# Altium PCB VISUR-botI_b.PcbDoc
Units mm, origin at the board's own origin, x right, y up, seen from the top; angles counter-clockwise.
Board outline 44.5 x 44.5 mm, 2 copper layers (Top Layer, Bottom Layer), stack 1.486 mm thick; 8 components, 13 nets, 52 pads, 0 vias.
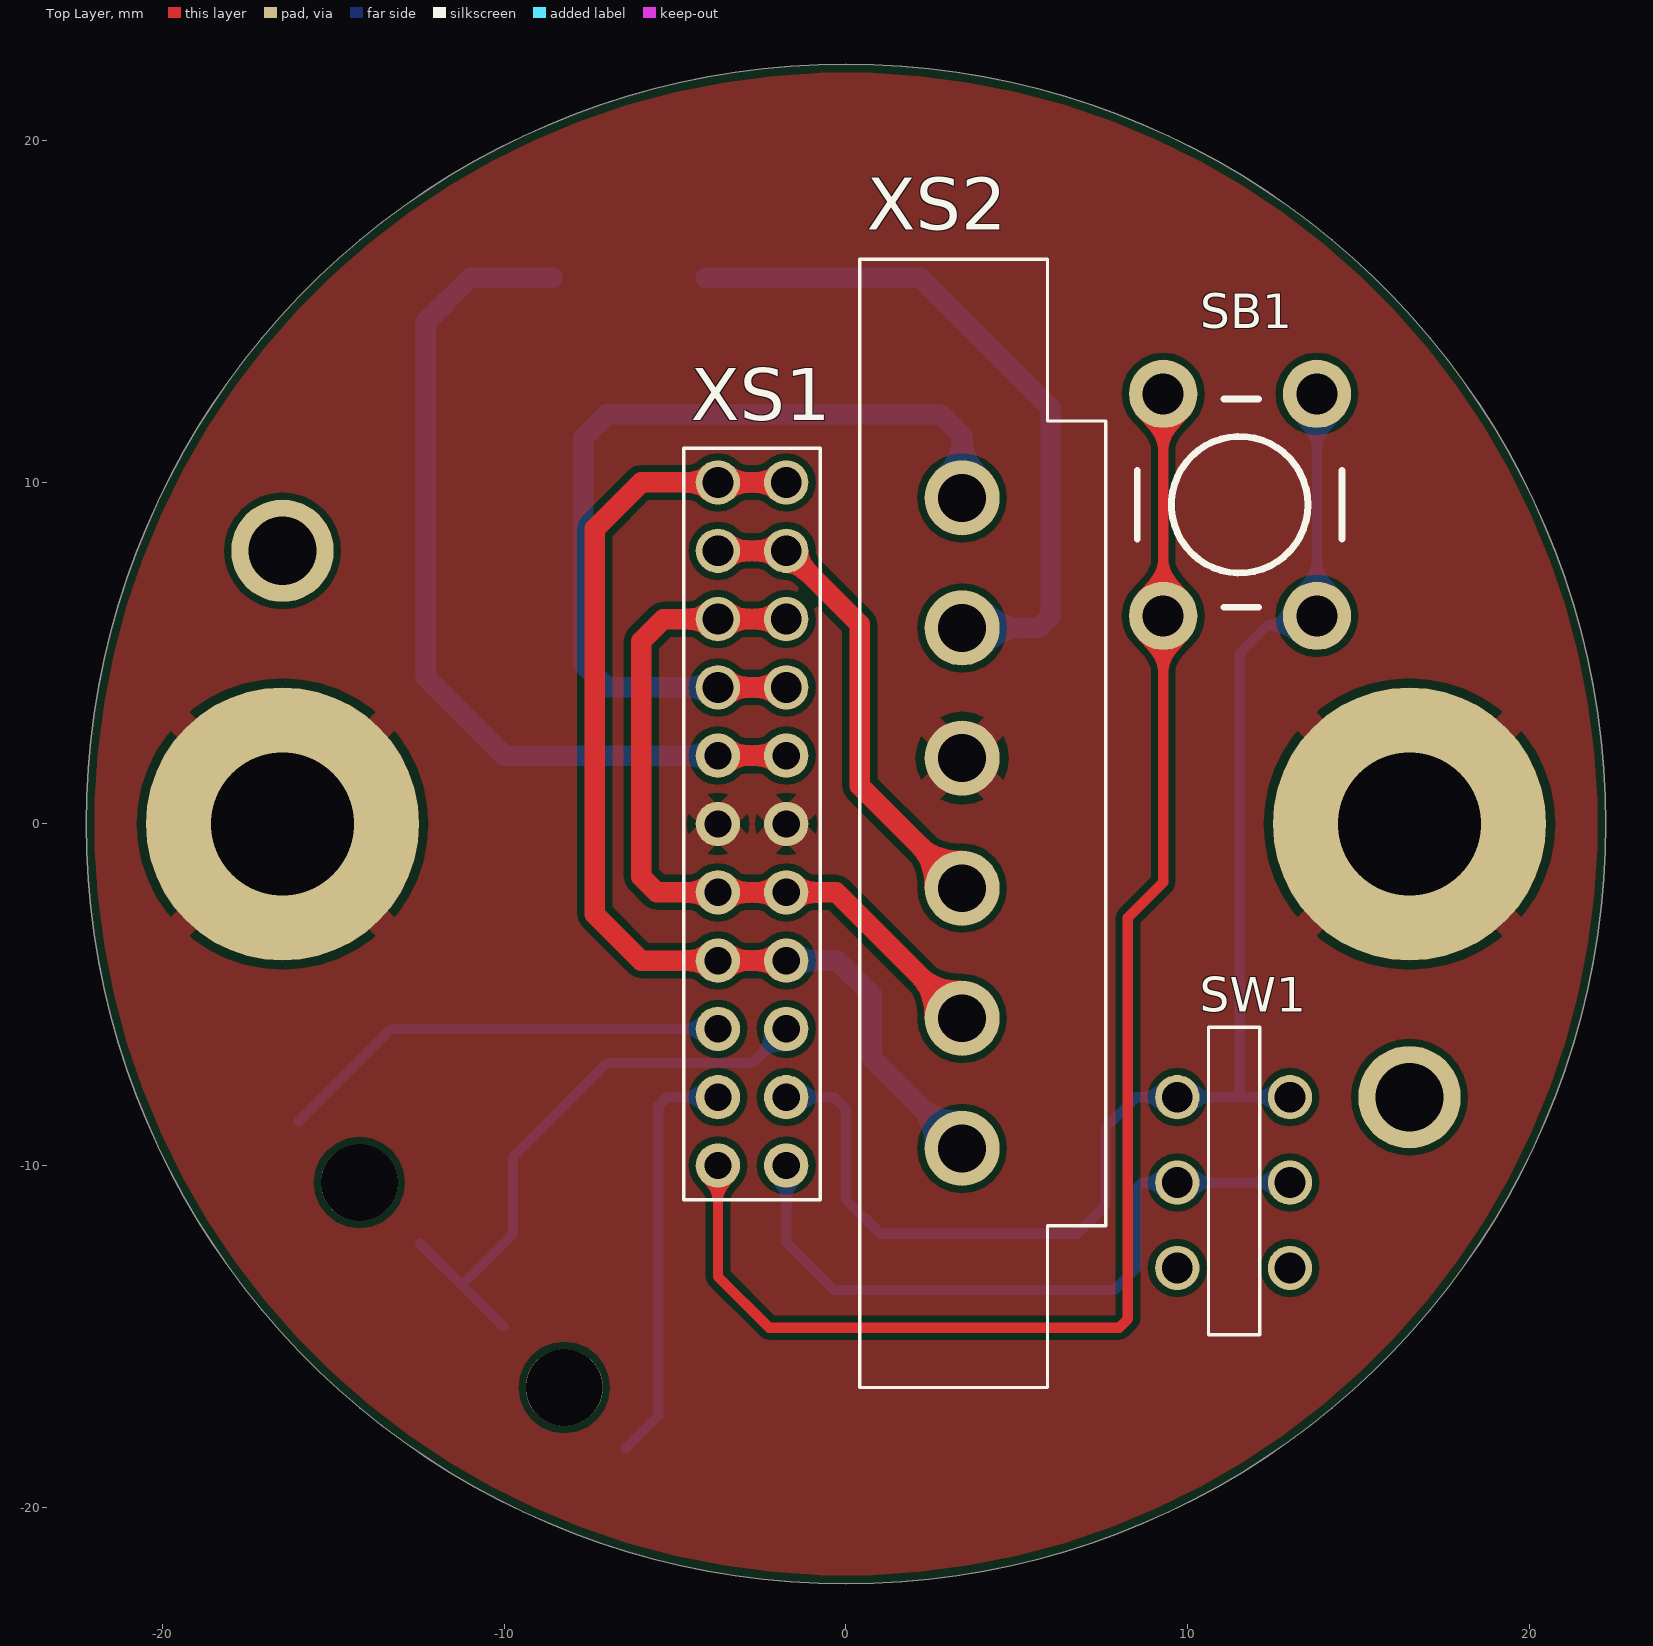
[diagram p0: Top Layer view]
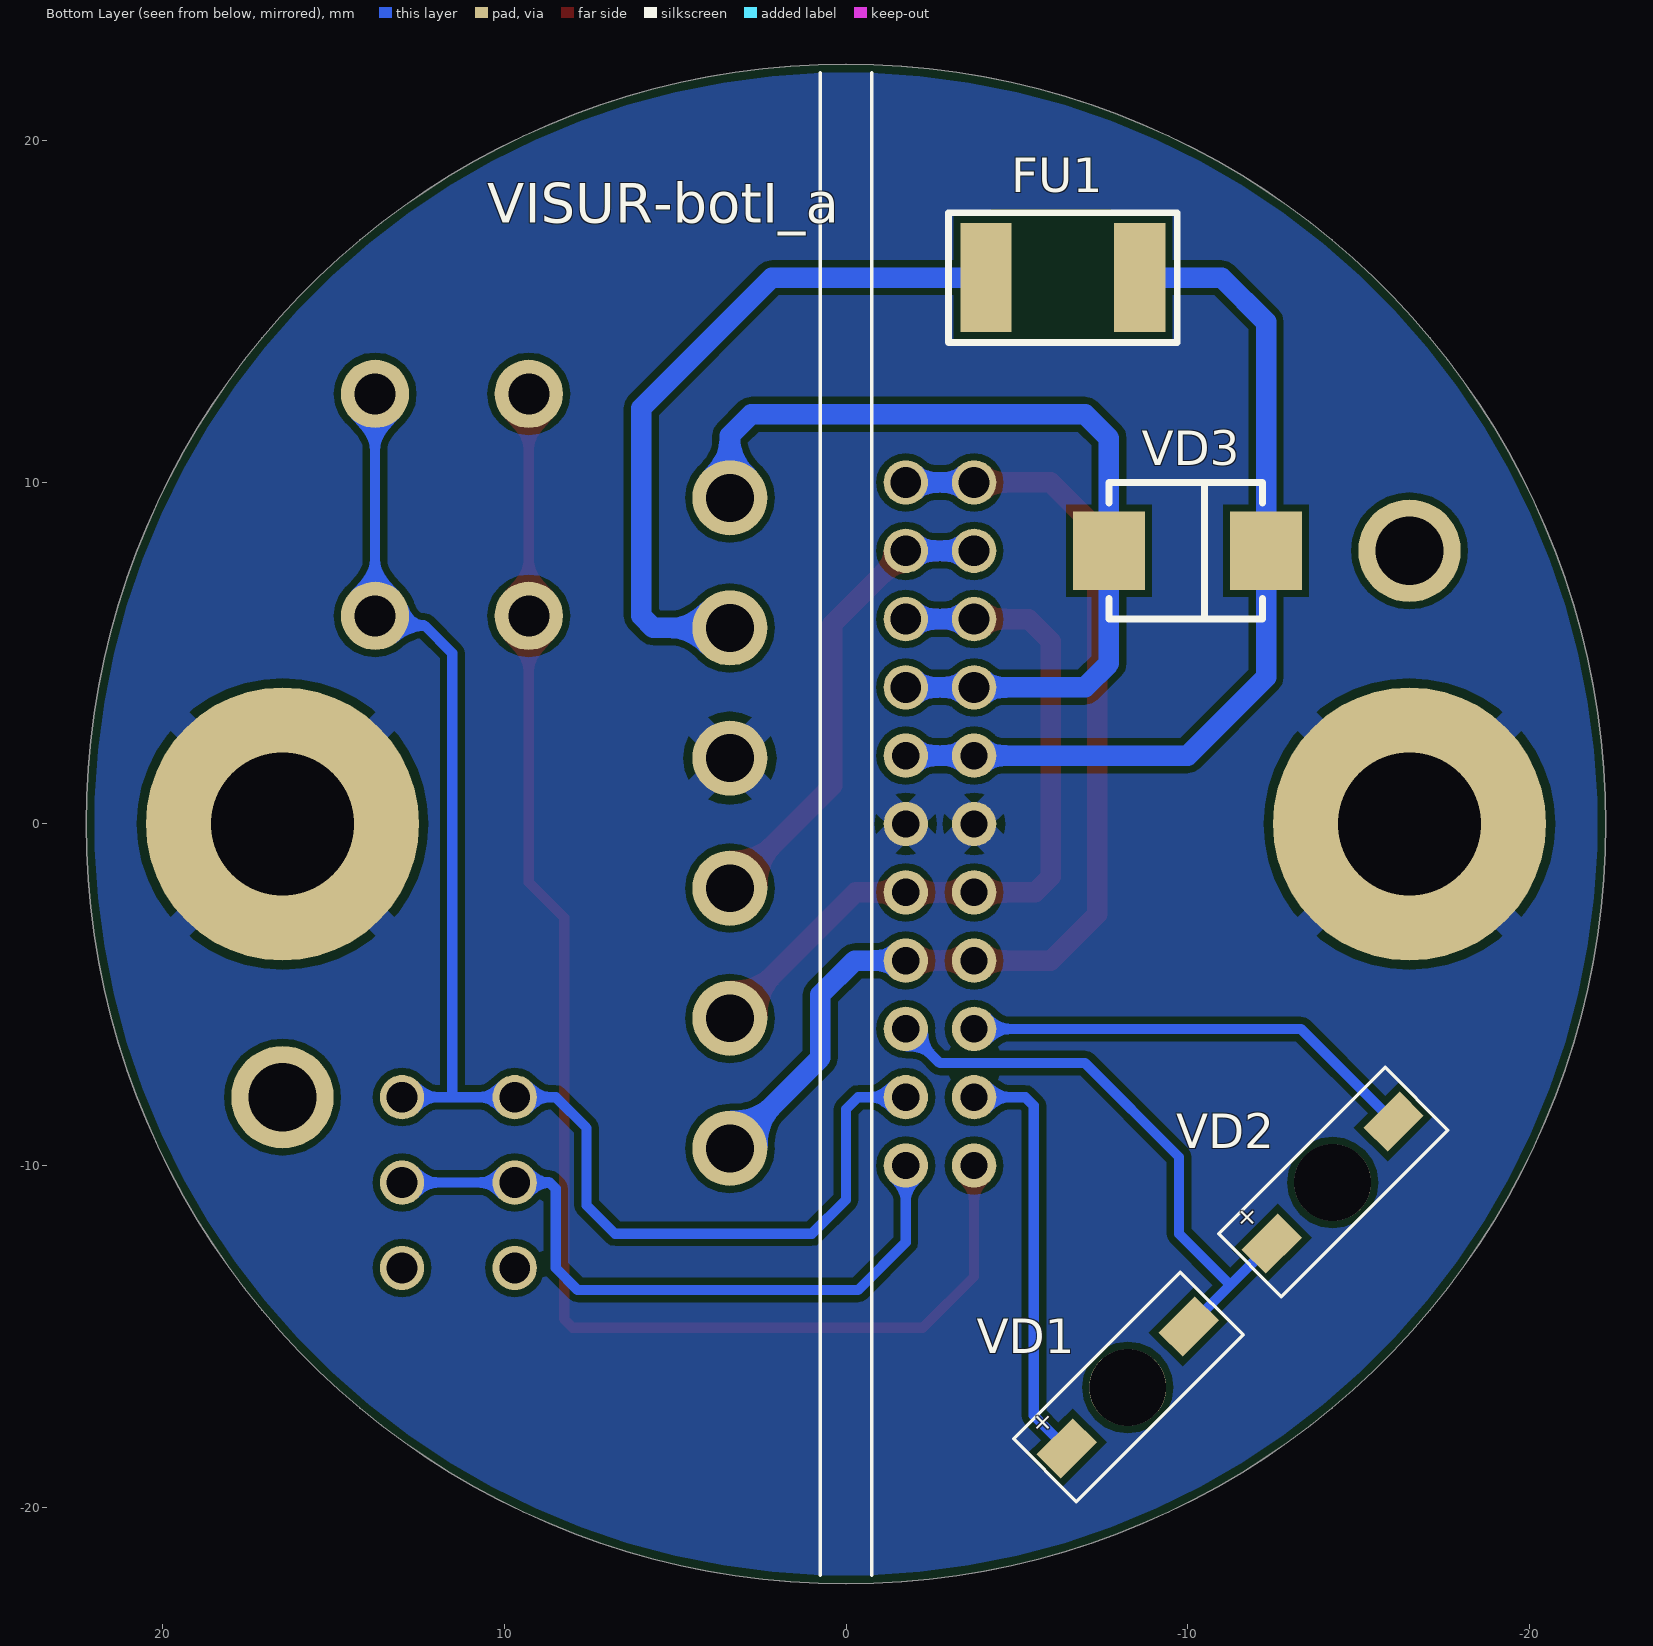
[diagram p1: Bottom Layer view, seen from below]
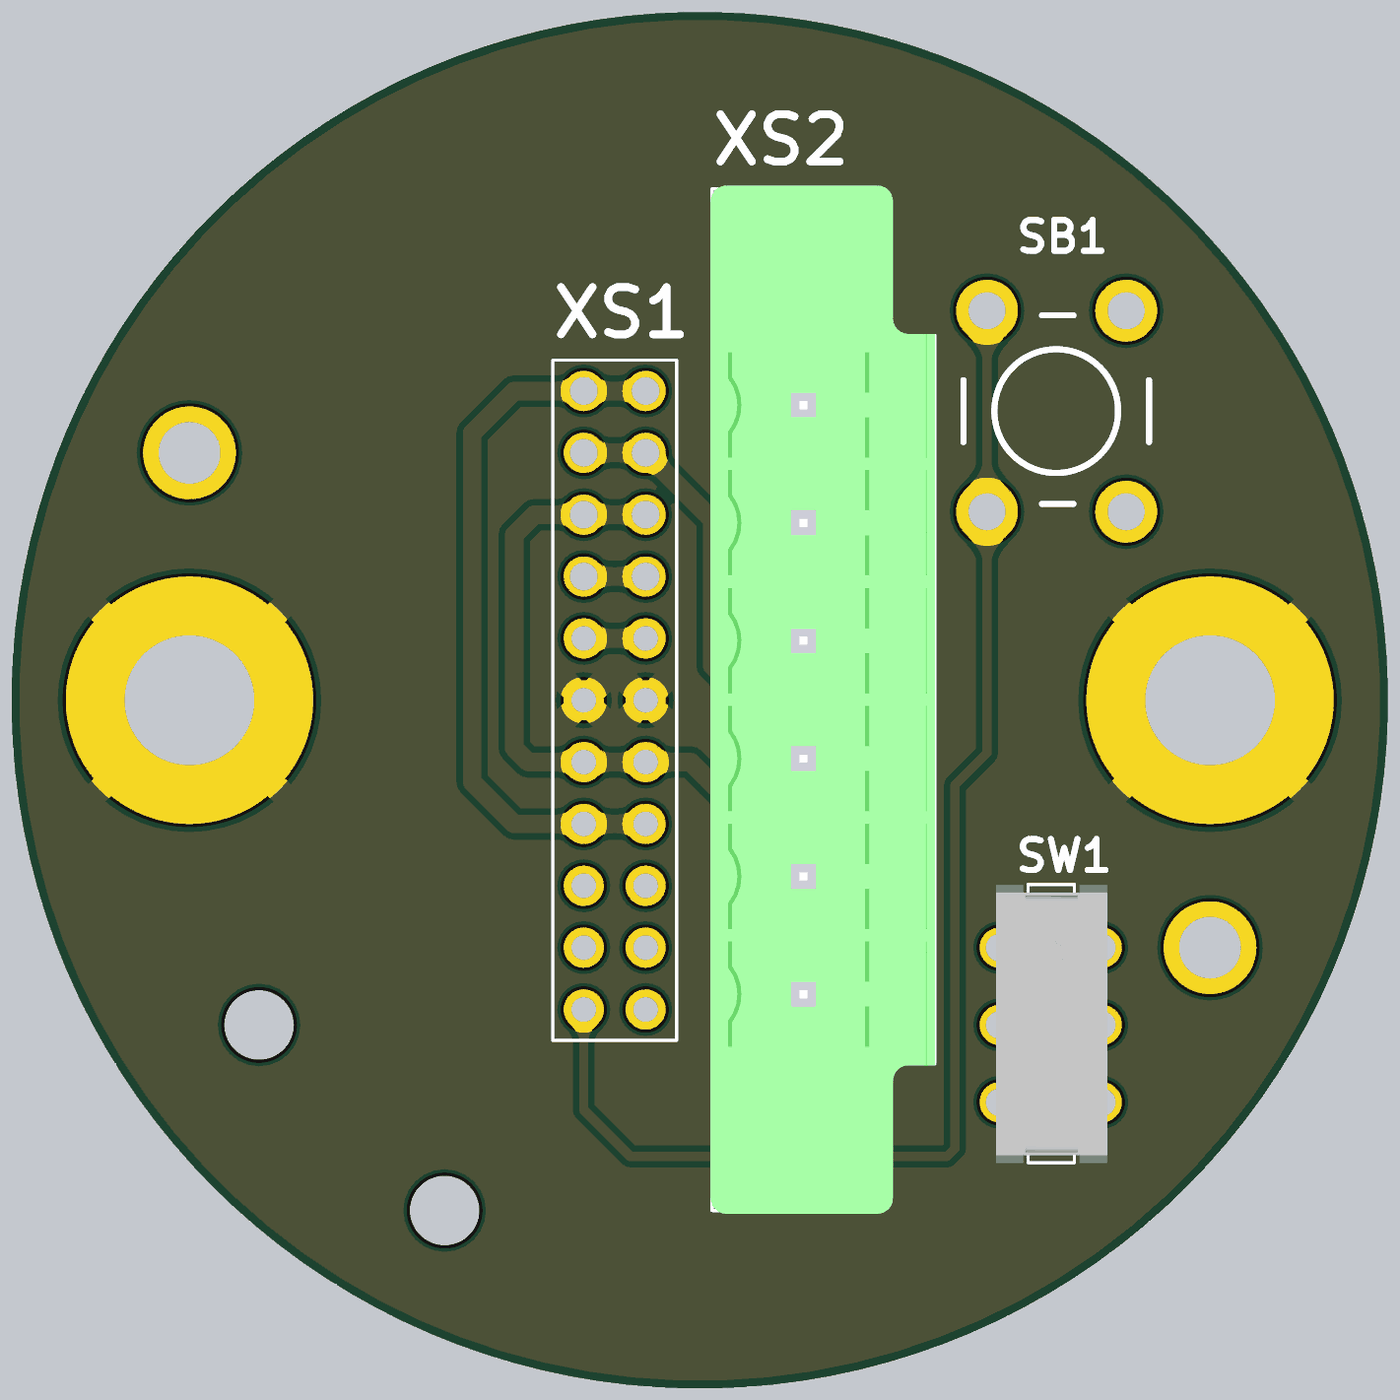
[diagram p2: 3D render of the assembled board from above, using the file's embedded part models]

## Layer stack, top to bottom
Top Solder: solder mask 0.0102, Solder Resist, Dk 3.5
Top Layer: signal copper 0.018
Dielectric 2: prepreg 0.125, PP-006, Dk 4.1
Dielectric 1: dielectric 1.2, FR-4, Dk 4.8
Dielectric 3: prepreg 0.125, PP-006, Dk 4.1
Bottom Layer: signal copper 0.018
Bottom Solder: solder mask 0.0102, Solder Resist, Dk 3.5

## Board outline
-22.25,0 ccw(c0,0) 0,-22.25 ccw(c0,0) 22.25,0 ccw(c0,0) 0,22.25 ccw(c0,0)

## Design rules (kind name [scope] priority, off if disabled: settings)
BoardOutlineClearance [All] p1: gap=0.254 ignorepadtopadclearanceinfootprint=FALSE except(0: Arc-SplitContinuation Track-SplitContinuation SMDPad-SplitContinuation THPad-SplitContinuation Via-SplitContinuation Fill-SplitContinuation Poly-SplitContinuation Region-SplitContinuation Text-SplitContinuation)
Clearance [All] p1: gap=0.2 ignorepadtopadclearanceinfootprint=FALSE except(0: Arc-Hole Track-Hole SMDPad-Hole THPad-Hole Via-Hole Fill-Hole Poly-Hole Region-Hole Text-Hole)
HoleSize [All] p1: absolutevalues=TRUE maxlimit=5 minlimit=0.025 maxpercent=80.000 minpercent=20.000
PolygonConnect CASE [InNet('NetXS1_11')] p1: thpad.connectstyle=Relief thpad.reliefconductorwidth=0.8 thpad.reliefentries=4 thpad.polygonreliefangle="45 Angle" thpad.airgapwidth=0.254 smdpad.connectstyle=Relief smdpad.reliefconductorwidth=0.254 smdpad.reliefentries=4 smdpad.polygonreliefangle="90 Angle" smdpad.airgapwidth=0.254 via.connectstyle=Direct via.reliefconductorwidth=0.254 via.reliefentries=4 via.polygonreliefangle="45 Angle" via.airgapwidth=0.254
PolygonConnect [All] p2: connectstyle=Relief reliefconductorwidth=0.3 reliefentries=4 polygonreliefangle="45 Angle" airgapwidth=0.254
RoutingVias [All] p1: holewidth=0.3 width=0.7 viastyle="Through Hole" minholewidth=0.3 minwidth=0.7 maxholewidth=0.711 maxwidth=1.27
SilkToSilkClearance [All] p1: silktosilkclearance=0.15
SolderMaskExpansion [All] p1: expansion=0.102 istentingtop=FALSE
Width [All] p1: maxlimit=5 minlimit=0.254 preferedwidth=0.254
28 further rules are at their usual default settings.

## Components (designator, comment, footprint, x,y, rotation, side; value= is the part's Value field where it differs from the comment)
FU1 "Electromechanics relay, 250VAC, , 5x20mm," "FUSE: 1812" -6,16 r0 bottom
SB1 "Tactile button, 6x6mm" "BUT: 6x6" 11.539,9.345 r90 top locked
SW1 "JS202011SCQN" JS202011CQN 13,-13 r90 top
VD1 "KM2520SURCK09" KM2520SURCK09 -6.465,-18.285 r135 bottom
VD2 "KM2520SURCK09" KM2520SURCK09 -12.465,-12.285 r135 bottom
VD3 "SMBJ33CA-TR" "DIODE: SMB" -10,8 r180 bottom
XS1 "PLD2-22-R(Female)" "CON: PLD2-22-R(Female)" -3.75,-10 r90 top locked
XS2 "15EDGVM-3.81-06P" "CON: 15EDGVM-3.81-06P" 3.4,-9.5 r90 top locked

## Footprints (in the part's own frame and the unit in brackets; to place one, negate y for a bottom-side part, rotate by r counter-clockwise, add the part's x,y. Pads: shape width x height; smd on the part's side, far side on the other; paste and mask are expansions set on the pad)
"BUT: 6x6" [mm] "Leaded Tactile Button 6x6"
  round 2 hole 1.2: 1(-3.25,2.25) 1(3.25,2.25) 2(-3.25,-2.25) 2(3.25,-2.25)
  silkscreen extent -3,-2.99 3.1,3.01, body extent -3.15,-2.96 3.25,3.04, height 4.5
"CON: 15EDGVM-3.81-06P" [mm]
  round 2.2 hole 1.4: 1(0,0) 2(3.81,0) 3(7.62,0) 4(11.43,0) 5(15.24,0) 6(19.05,0)
  silkscreen extent -7,-4.2 26.04,3, body extent -7.1,-4.2 26.14,3.05, height 9.2
"CON: PLD2-22-R(Female)" [mm]
  round 1.3 hole 0.8: 1(0,-2) 2(0,0) 3(2,-2) 4(2,0) 5(4,-2) 6(4,0) 7(6,-2) 8(6,0) 9(8,-2) 10(8,0) 11(10,-2) 12(10,0) 13(12,-2) 14(12,0)
  round 1.3 hole 0.9: 15(14,-2) 16(14,0) 17(16,-2) 18(16,0) 19(18,-2) 20(18,0) 21(20,-2) 22(20,0)
  silkscreen extent -1,-3 21,1
"DIODE: SMB" [mm]
  rect 2.1x2.3 smd: 1(-2.3,0) 2(2.3,0)
  silkscreen extent -2.3,-2 2.2,2, body extent -2.75,-1.95 2.75,1.95, height 2.45
"FUSE: 1812" [mm]
  rect 1.5x3.2 smd: 1(-2.6,0) 2(1.9,0)
  Top Layer pour cut-out: -1.75,2.25
  Top Layer pour cut-out: -1.75,-2 1.75,-2 1.75,2 -1.5,2 -1.75,2
  silkscreen extent -3.7,-1.9 3,1.9, body extent -2.71,-1.61 2.11,1.61, height 1.32
JS202011CQN [mm]
  round 1.3 hole 0.9: 1(0,0) 2(2.5,0) 3(5,0) 4(5,3.3) 5(2.5,3.3) 6(0,3.3)
  silkscreen extent -1.96,0.88 7.04,2.38, body extent -1.96,-0.17 7.04,3.43, height 5.22
KM2520SURCK09 [mm] "SM LED Body 1.6x0.8mm; 2 Flat Leads"
  round 2.25 hole 2.25 unplated: 0(2.525,0)
  rect 1.5x1 smd: 1(0,0) 2(5.05,0)
  silkscreen extent -0.9,-1.3 6,1.3, body extent 1.1,-0.9 3.5,1, height 1.5

## Part data
FU1: library part Fuse, Manufacturer=Littelfuse, Package=5x20mm, PartNumber=01110501Z, VoltageMax=250VAC, HelpURL=https://www.digikey.com/products/en?keywords=01110501Z, TypeFuse="Electromechanics relay", ValueManufacturerPartNumber="Electromechanics relay, 250VAC, , 5x20mm,"
SB1: library part Button_tactile, Manufacturer="TE Connectivity", Package=6x6mm, PartNumber=FSM2JSMAATR, CommentText="\"Кнопка\"", ComponentLink1Description=Datasheet(6x6), ComponentLink1URL=https://static.chipdip.ru/lib/551/DOC001551938.pdf, TypeButton="Tactile button", ValueManufacturerPartNumber="Tactile button, 6x6mm"
SW1: "Переключатель", Manufacturer="C&K Component", ReplacementPart1Manufacturer=Китай, ReplacementPart1PartNumber=is-1390, ComponentLink1Description="Data Sheet", ComponentLink1URL=https://ru.mouser.com/datasheet/2/60/js-1841892.pdf, ComponentLink2Description="Replacement 1 DataSheet"
VD1 VD2: "LED"
VD3: library part SMBJ10CA-TR
XS1: library part PLD2-22(Female), ComponentLink1Description=Datasheet, ComponentLink1URL=https://www.compel.ru/item-pdf/1e1366ded138976aeb89dd182fa987b9/ps/kls~kls1-207b.pdf
XS2: ComponentLink1Description=Datasheet, ComponentLink1URL=https://www.phoenixcontact.com/online/portal/ru/?uri=pxc-oc-itemdetail:pid=1830635&library=&pcck=P-11-02-11&tab=1&selectedCategory=ALL

## Free pads (board coordinates)
  round 8 hole 4.2: 0(-16.5,0) 0(16.5,0)
  round 3 hole 2: 1(-16.5,8) 1(16.5,-8)

## Nets (pads, with @x,y where several pads share a name; then routed paths per layer and width w, separated by ;. In a path a pad name is that pad's centre, name@x,y a point inside that pad or via, vN(x,y) a via of type N, cw(c..) or ccw(c..) an arc to the next point about the centre after c; other vN are vias at no path point)
NetFU1_1: FU1.1 VD3.2 XS1.13 XS1.14 | length 28.1
  Top Layer w0.6: XS1.14 XS1.13
  Bottom Layer w0.6: FU1.1 -11,16 -12.3,14.7 VD3.2 -12.3,4.3 -10,2 XS1.14 XS1.13
NetFU1_2: FU1.2 XS2.5 | length 20.5
  Bottom Layer w0.6: FU1.2 2.178,16 6,12.178 6,6.095 5.645,5.74 XS2.5
NetSB1_1: SB1.1 XS1.2 | length 43.5
  Top Layer w0.3: XS1.2 -3.75,-13.25 -2.25,-14.75 8,-14.75 8.252,-14.498 8.252,-2.748 9.289,-1.711 9.289,6.095 SB1.1@9.289,12.595
NetSB1_2: SB1.2 SW1.3 SW1.4 XS1.3 | length 44.6
  Bottom Layer w0.3: XS1.3 -0.351,-8 0,-8.351 0,-11 1,-12 6.764,-12 7.6,-11.164 7.6,-8.9 8.5,-8 SW1.4 SW1.3 11.526,-8 ; 11.526,-7.96 11.527,-7.958 11.527,5 12.339,5.812 13.506,5.812 13.789,6.095 SB1.2@13.789,12.595
NetSW1_2: SW1.2 SW1.5 XS1.1 | length 20.2
  Bottom Layer w0.3: XS1.1 -1.75,-12.25 -0.351,-13.649 7.851,-13.649 8.5,-13 8.5,-10.676 8.676,-10.5 SW1.5 SW1.2
NetVD1_1: VD1.1 XS1.4 | length 12.3
  Bottom Layer w0.3: VD1.1 -5.5,-17.321 -5.5,-8.25 -5.25,-8 XS1.4
NetVD1_2: VD1.2 VD2.1 XS1.5 | length 17.4
  Bottom Layer w0.3: VD2.1 -11.25,-13.5 ; VD1.2 -11.25,-13.5 ; XS1.5 -2.75,-7 -3.336,-7 -7,-7 -9.75,-9.75 -9.75,-12 -11.25,-13.5
NetVD2_2: VD2.2 XS1.6 | length 13.4
  Bottom Layer w0.3: VD2.2 -13.321,-6 XS1.6
NetVD3_1: VD3.1 XS1.15 XS1.16 XS2.6 | length 28.3
  Top Layer w0.6: XS1.16 XS1.15
  Bottom Layer w0.6: XS1.15 XS1.16 -7,4 -7.7,4.7 VD3.1 -7.7,11.3 -7,12 2.773,12 3.4,11.373 XS2.6
NetXS1_7: XS1.7 XS1.8 XS1.21 XS1.22 XS2.1 | length 34.1
  Top Layer w0.6: XS1.7 XS1.8 -6,-4 -7.36,-2.64 -7.36,8.64 -6,10 XS1.22 XS1.21
  Bottom Layer w0.6: XS1.22 XS1.21 ; XS1.7 -0.25,-4 0.75,-5 0.75,-6.85 XS2.1
NetXS1_9: XS1.9 XS1.10 XS1.17 XS1.18 XS2.2 | length 24.7
  Top Layer w0.6: XS1.17 XS1.18 -5.35,6 -6,5.35 -6,-1.54 -5.54,-2 XS1.10 XS1.9 ; XS1.9@-1.702,-1.953 XS1.9 ; XS1.9@-1.66,-2.09 XS1.9 ; XS2.2 -0.29,-2 XS1.9
  Bottom Layer w0.6: XS1.18 XS1.17
NetXS1_11: pad.0 XS1.11 XS1.12 XS2.4
NetXS1_19: XS1.19 XS1.20 XS2.3 | length 16.2
  Top Layer w0.6: XS1.20 XS1.19@-1.6,8 ; XS1.19 0.4,5.85 0.4,1.12 XS2.3
  Bottom Layer w0.6: XS1.20 XS1.19
pads on no net: SW1.1 SW1.6 VD1.0 VD2.0

## Polygon pours and split planes (outlines as drawn)
NetXS1_11 on Top Layer "NETXS1_11_L01_P000" (solid, pour order 0): -22.25,0 ccw(c0,0) 0,-22.25 ccw(c0,0) 22.25,0 ccw(c0,0) 0,22.25 ccw(c0,0)
NetXS1_11 on Bottom Layer "NETXS1_11_L02_P001" (solid, pour order 1): -22.25,0 ccw(c0,0) 0,-22.25 ccw(c0,0) 22.25,0 ccw(c0,0) 0,22.25 ccw(c0,0)

## Silkscreen, mask and mechanical layers (free items; w line width, h text height)
Bottom Overlay:
  lines w0.1: -0.75,-22 -0.75,22 ; 0.75,-22 0.75,22
  text "VISUR-botI_a" at 10.498,17.22 h2
Board:
  circle w0.15: c0,0 r22.25

## Text inside footprints (layer, text, board x,y; h text height)
VD1: Bottom Overlay "+" at -5.828,-18.073 h1 r315
VD2: Bottom Overlay "+" at -11.828,-12.073 h1 r315